# Altium PCB PCB.PcbDoc
Units mm, origin at the board's own origin, x right, y up, seen from the top; angles counter-clockwise.
Board outline 24.4 x 43.9 mm, 2 copper layers (Top Layer, Bottom Layer), stack 1.271 mm thick; 10 components, 28 nets, 78 pads, 96 vias.
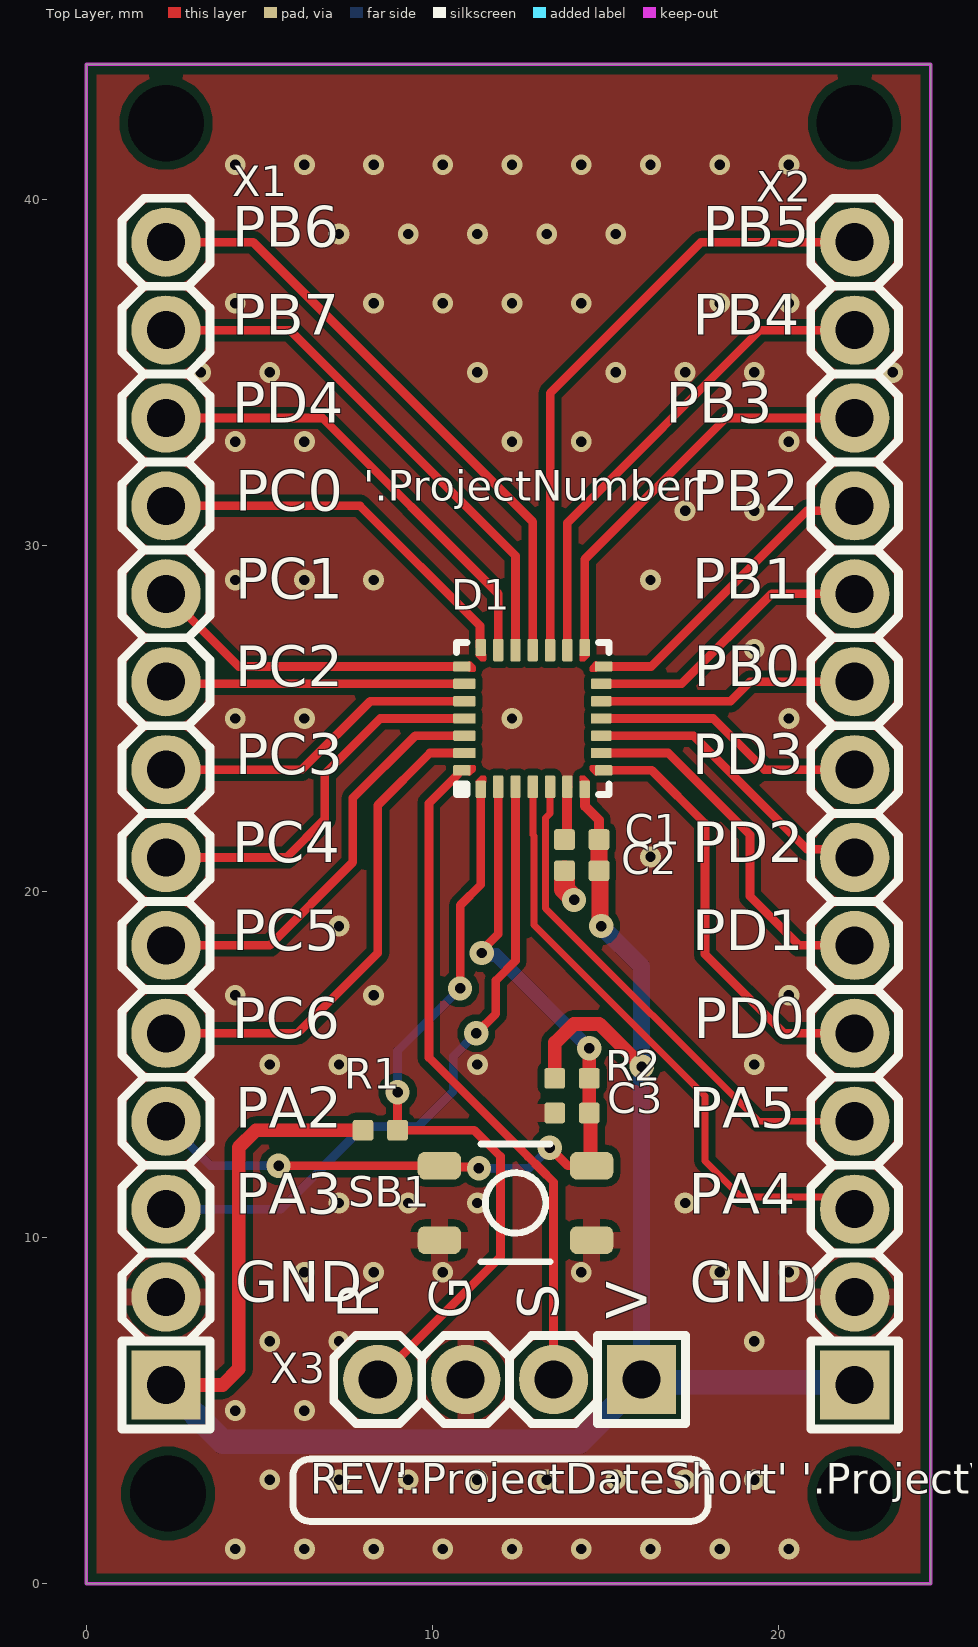
[diagram p0: Top Layer view]
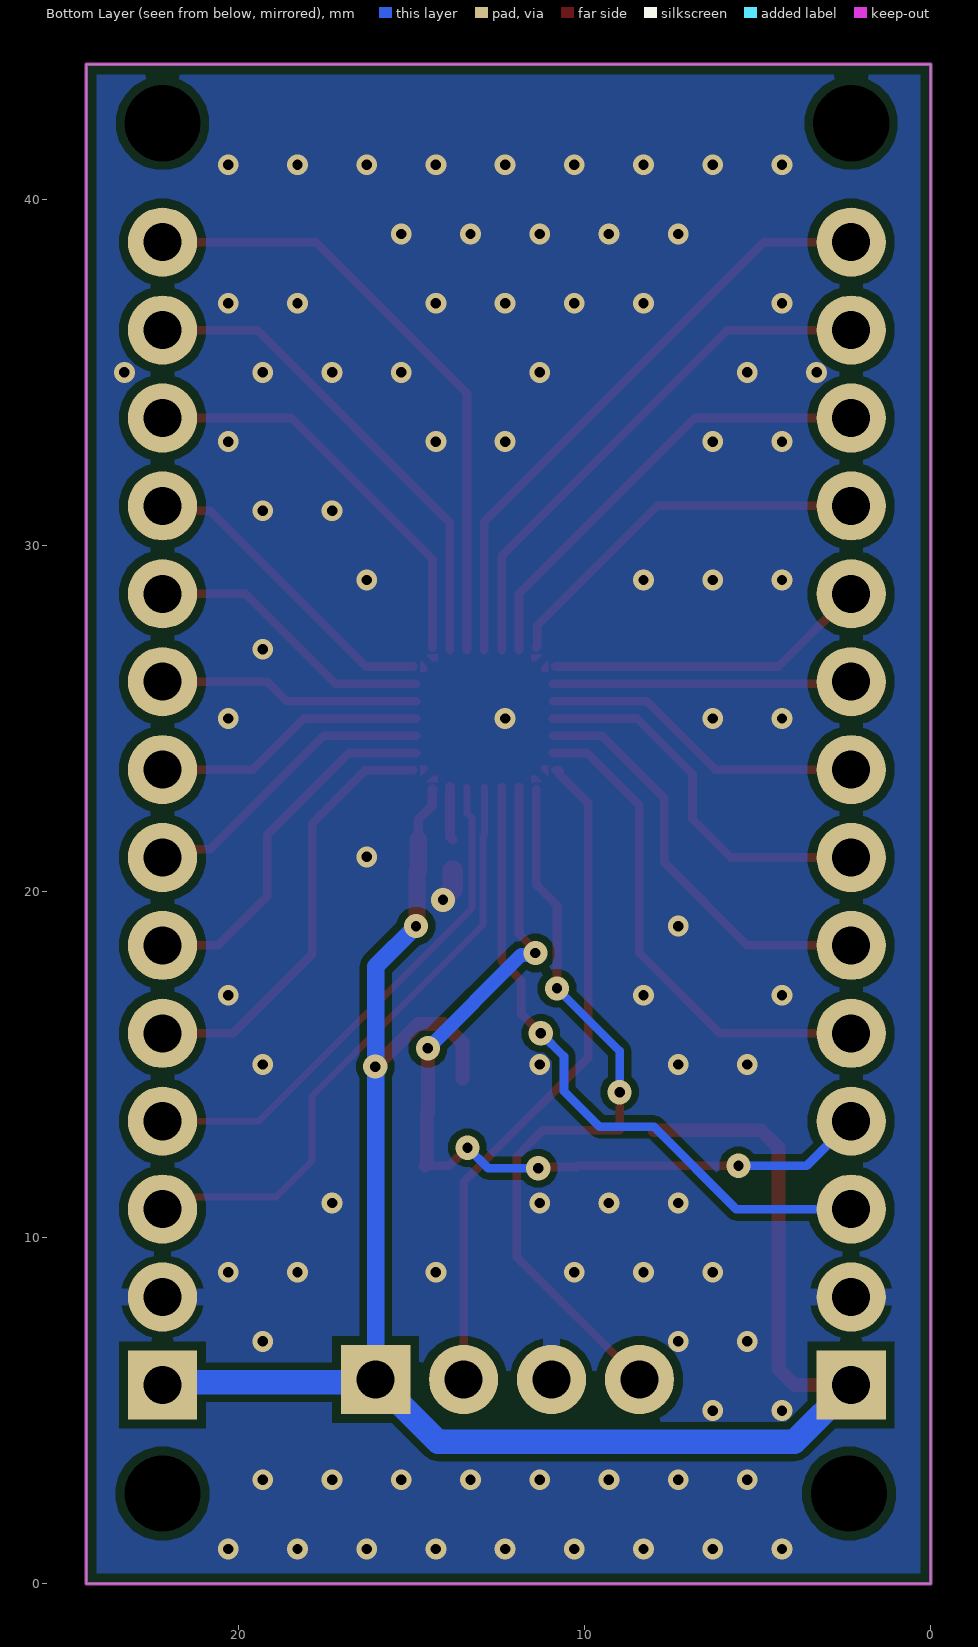
[diagram p1: Bottom Layer view, seen from below]
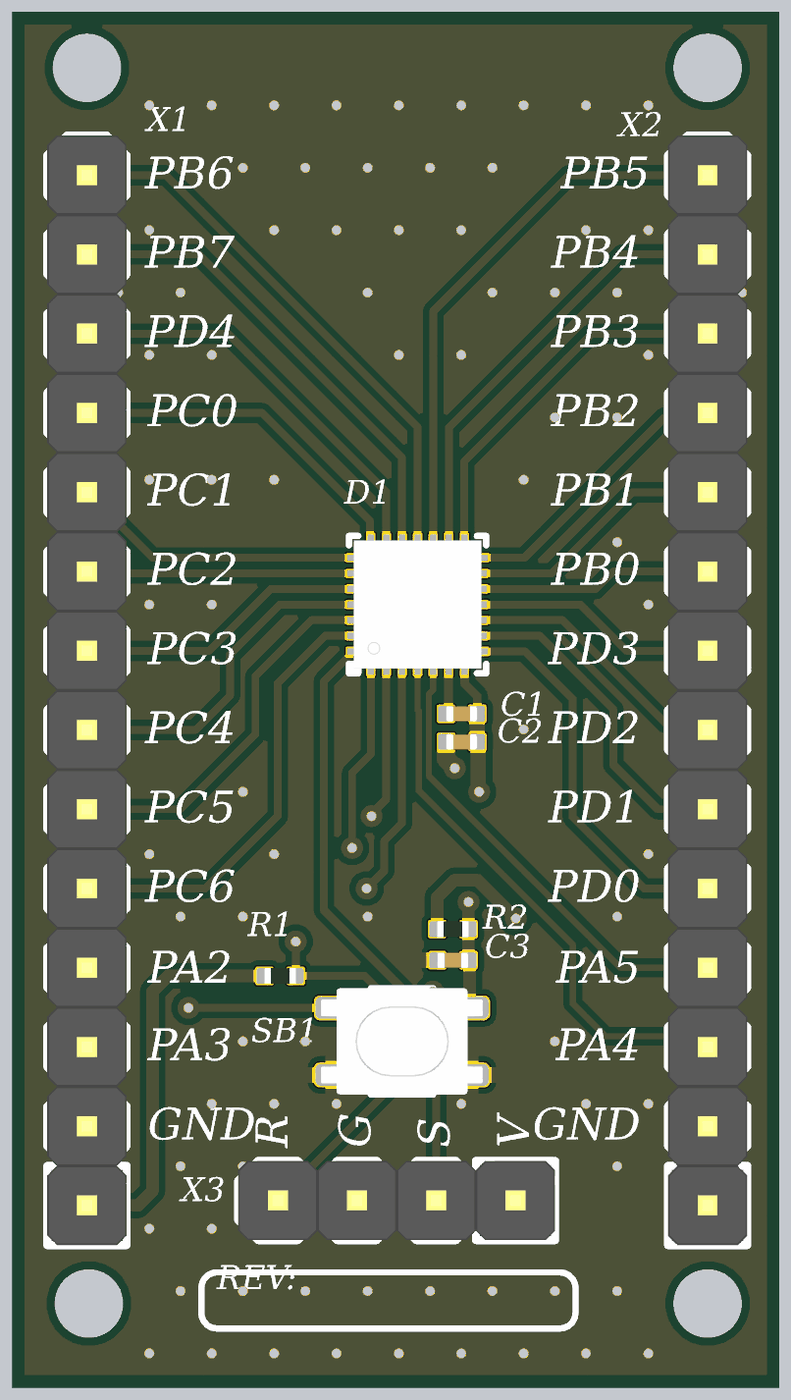
[diagram p2: 3D render of the assembled board from above, using the file's embedded part models]

## Layer stack, top to bottom
Top Solder: solder mask 0.0102, Solder Resist, Dk 3.5
Top Layer: signal copper 0.0356
Dielectric 1: dielectric 1.2, FR-4, Dk 4.8
Bottom Layer: signal copper 0.0356
Bottom Solder: solder mask 0.0102, Solder Resist, Dk 3.5

## Board outline
0,0 0,43.9 24.4,43.9 24.4,0

## Design rules (kind name [scope] priority, off if disabled: settings)
AcuteAngle [All] p1: minimum=4.50000000000000E+0001 checktracksonly=TRUE
BoardOutlineClearance [All] p1: gap=0.3 ignorepadtopadclearanceinfootprint=FALSE
Clearance Clearance_NPTH [All vs InPadClass('NPTH')] p1: gap=0.4 ignorepadtopadclearanceinfootprint=FALSE except(0: Arc-Hole Track-Hole SMDPad-Hole THPad-Hole Via-Hole Fill-Hole Poly-Hole Region-Hole Text-Hole)
Clearance Clearance_MultiLayerPad [OnLayer('Multi-Layer') and IsPad] p2: gap=0.25 ignorepadtopadclearanceinfootprint=FALSE except(0: Arc-Hole Track-Hole SMDPad-Hole THPad-Hole Via-Hole Fill-Hole Poly-Hole Region-Hole Text-Hole)
Clearance Clearance_Polygon [InPolygon] p3: gap=0.2 ignorepadtopadclearanceinfootprint=FALSE except(0: Arc-Hole Track-Hole SMDPad-Hole THPad-Hole Via-Hole Fill-Hole Poly-Hole Region-Hole Text-Hole)
Clearance [All] p4: gap=0.15 ignorepadtopadclearanceinfootprint=FALSE except(0: Arc-Hole Track-Hole SMDPad-Hole THPad-Hole Via-Hole Fill-Hole Poly-Hole Region-Hole Text-Hole; 0.127: Arc-Arc Arc-Track Track-Track)
ComponentClearance [All] p1: gap=0.254 collisioncheckmode=3 verticalgap=0.2 showdistances=FALSE
DiffPairsRouting [All] p1: maxlimit=0.254 minlimit=0.2 mostfreqgap=0.254 toplayer_minwidth=0.2 toplayer_maxwidth=0.5 toplayer_prefwidth=0.3 bottomlayer_minwidth=0.2 bottomlayer_maxwidth=0.5 bottomlayer_prefwidth=0.3 maxuncoupledlength=12.7
Height [All] p1: minheight=0 maxheight=60 prefheight=12.7
HoleSize [All] p1: absolutevalues=TRUE maxlimit=6.3 minlimit=0.3 maxpercent=80.000 minpercent=20.000
HoleToHoleClearance [All] p1: gap=0.5 allowstackedmicrovias=TRUE
MinimumAnnularRing [All] p1: minimumring=0.13
MinimumSolderMaskSliver [All] p1: minsoldermaskwidth=0.05
PasteMaskExpansion [All] p1: expansion=-0.05
PlaneClearance [All] p1: clearance=0.5
PlaneConnect [All] p1: planeconnectstyle=Relief reliefexpansion=0.5 reliefentries=4 reliefconductorwidth=0.3 reliefairgap=0.2
PolygonConnect PolygonConnect_PowerPAD [All vs InPadClass('PowerPAD')] p1: connectstyle=Relief reliefconductorwidth=1 reliefentries=4 polygonreliefangle="90 Angle" airgapwidth=0.3
PolygonConnect PolygonConnect_PadGND [InNet('GND') and IsPad] p2: connectstyle=Relief reliefconductorwidth=0.5 reliefentries=4 polygonreliefangle="90 Angle" airgapwidth=0.2
PolygonConnect PolygonConnect_Via [IsVia] p3: connectstyle=Direct reliefconductorwidth=0.254 reliefentries=4 polygonreliefangle="90 Angle" airgapwidth=0.254
PolygonConnect [All] p4: connectstyle=Relief reliefconductorwidth=0.6 reliefentries=4 polygonreliefangle="90 Angle" airgapwidth=0.3
RoomDefinition MainPage [InComponentClass('MainPage')] p1: confinementstyle=ConfineIn formatcopy=TRUE lockcomponents=FALSE outline 6.769,4.249 6.769,7.551 7.096,7.551 7.096,22.604 10.296,22.604 10.296,27.604 15.504,27.604 15.504,22.204 15.636,22.204 15.636,7.551 17.691,7.551 17.691,4.249
RoomDefinition Connectors [InComponentClass('Connectors')] p2: confinementstyle=ConfineIn formatcopy=TRUE lockcomponents=FALSE outline 0.649,4.09 0.649,40.412 23.851,40.412 23.851,4.09
RoutingVias [All] p1: holewidth=0.3 width=0.7 viastyle="Through Hole" minholewidth=0.3 minwidth=0.6 maxholewidth=0.5 maxwidth=1.2
SilkToSilkClearance [All] p1: silktosilkclearance=0
SilkToSolderMaskClearance [IsPad] p1: minsilkscreentomaskgap=0.15 clearancetoexposedcopper=TRUE
SolderMaskExpansion SolderMaskExpansion_VIa [isVia] p1: expansion=0.102 istentingtop=TRUE
SolderMaskExpansion [All] p2: expansion=0.05 istentingtop=FALSE
UnRoutedNet [All] p1: checkbadconnections=TRUE
Width [All] p1: maxlimit=10 minlimit=0.127 preferedwidth=0.2
18 further rules are at their usual default settings.

## Classes and differential pairs
component class MainPage: C1 C2 D1 R1 X3
component class Connectors: C3 R2 SB1 X1 X2

## Components (designator, comment, footprint, x,y, rotation, side; value= is the part's Value field where it differs from the comment)
C1 "10nF" CH0402C 14.313,21.5 r0 top
C2 "100nF" CH0402C 14.313,20.6 r0 top
C3 "100nF" CH0402C 14.032,13.6 r0 top
D1 "STM8L151GxU6" 28-UFQFPN 12.9,25 r90 top
R1 "100k" CH0402R 8.492,13.1 r180 top
R2 "100k" CH0402R 14.032,14.6 r180 top
SB1 "\"Кнопка\"" "BUT: YTS-A017" 12.4,11 r180 top
X1 "" "CON: PLS-14" 2.3,22.251 r90 top
X2 "" "CON: PLS-14" 22.2,22.251 r90 top
X3 "PLS-4" "CON: PLS-4" 12.23,5.9 r180 top

## Footprints (in the part's own frame and the unit in brackets; to place one, negate y for a bottom-side part, rotate by r counter-clockwise, add the part's x,y. Pads: shape width x height; smd on the part's side, far side on the other; paste and mask are expansions set on the pad)
28-UFQFPN [mm] "28-lead, 4 x 4 mm, 0.5 mm pitch"
  rrect25% 0.5x0.3 smd: 1(-2.05,1.5) 7(-2.05,-1.5) 15(2.05,-1.5) 21(2.05,1.5)
  rrect25% 0.65x0.3 smd: 2(-1.975,1) 3(-1.975,0.5) 4(-1.975,0) 5(-1.975,-0.5) 6(-1.975,-1) 16(1.975,-1) 17(1.975,-0.5) 18(1.975,0) 19(1.975,0.5) 20(1.975,1)
  rrect25% 0.3x0.5 smd: 8(-1.5,-2.05) 14(1.5,-2.05) 22(1.5,2.05) 28(-1.5,2.05)
  rrect25% 0.3x0.6 smd: 9(-1,-1.975) 10(-0.5,-1.975) 11(0,-1.975) 12(0.5,-1.975) 13(1,-1.975)
  rrect25% 0.3x0.65 smd: 23(1,1.975) 24(0.5,1.975) 25(0,1.975) 26(-0.5,1.975) 27(-1,1.975)
  Top Layer region: 1.65,-1.4 1.65,-1.472 1.655,-1.498 1.67,-1.52 1.67,-1.52 1.782,-1.632 1.802,-1.645 1.826,-1.65 1.826,-1.65 1.85,-1.65 1.85,-1.35 1.7,-1.35 1.681,-1.354 1.665,-1.365 1.654,-1.381 1.65,-1.4
  Top Layer region: 1.4,-1.65 1.472,-1.65 1.498,-1.655 1.52,-1.67 1.52,-1.67 1.632,-1.782 1.645,-1.802 1.65,-1.826 1.65,-1.826 1.65,-1.85 1.35,-1.85 1.35,-1.7 1.354,-1.681 1.365,-1.665 1.381,-1.654 1.4,-1.65
  Top Layer region: -1.65,1.4 -1.65,1.472 -1.655,1.498 -1.67,1.52 -1.67,1.52 -1.782,1.632 -1.802,1.645 -1.826,1.65 -1.826,1.65 -1.85,1.65 -1.85,1.35 -1.7,1.35 -1.681,1.354 -1.665,1.365 -1.654,1.381 -1.65,1.4
  Top Layer region: -1.4,1.65 -1.472,1.65 -1.498,1.655 -1.52,1.67 -1.52,1.67 -1.632,1.782 -1.645,1.802 -1.65,1.826 -1.65,1.826 -1.65,1.85 -1.35,1.85 -1.35,1.7 -1.354,1.681 -1.365,1.665 -1.381,1.654 -1.4,1.65
  Top Layer region: 1.4,1.65 1.472,1.65 1.498,1.655 1.52,1.67 1.52,1.67 1.632,1.782 1.645,1.802 1.65,1.826 1.65,1.826 1.65,1.85 1.35,1.85 1.35,1.7 1.354,1.681 1.365,1.665 1.381,1.654 1.4,1.65
  Top Layer region: 1.65,1.4 1.65,1.472 1.655,1.498 1.67,1.52 1.67,1.52 1.782,1.632 1.802,1.645 1.826,1.65 1.826,1.65 1.85,1.65 1.85,1.35 1.7,1.35 1.681,1.354 1.665,1.365 1.654,1.381 1.65,1.4
  Top Layer region: -1.4,-1.65 -1.472,-1.65 -1.498,-1.655 -1.52,-1.67 -1.52,-1.67 -1.632,-1.782 -1.645,-1.802 -1.65,-1.826 -1.65,-1.826 -1.65,-1.85 -1.35,-1.85 -1.35,-1.7 -1.354,-1.681 -1.365,-1.665 -1.381,-1.654 -1.4,-1.65
  Top Layer region: -1.65,-1.4 -1.65,-1.472 -1.655,-1.498 -1.67,-1.52 -1.67,-1.52 -1.782,-1.632 -1.802,-1.645 -1.826,-1.65 -1.826,-1.65 -1.85,-1.65 -1.85,-1.35 -1.7,-1.35 -1.681,-1.354 -1.665,-1.365 -1.654,-1.381 -1.65,-1.4
  silkscreen extent -2.2,-2.2 2.2,2.2, body extent -2.05,-2.05 2.05,2.05, height 0.65
"BUT: YTS-A017" [mm] "Tactile button 5.2x3.4x2.5 SMD"
  rrect50% 1.25x0.8 smd: 1(-2.2,1.075) 1(2.2,1.075) 2(-2.2,-1.075) 2(2.2,-1.075)
  silkscreen extent -1,-1.7 1,1.7, body extent -2.6,-1.7 2.6,1.7, height 2.5
CH0402C [mm]
  rrect25% 0.6x0.6 smd: 1(-0.5,0) 2(0.5,0)
  body extent -0.5,-0.25 0.5,0.25, height 0.5
CH0402R [mm]
  rrect25% 0.6x0.6 smd: 1(-0.5,0) 2(0.5,0)
  body extent -0.5,-0.25 0.5,0.26, height 0.33
"CON: PLS-4" [mm] "PLS-40 4 pin header"
  rect 2x2 hole 1.1: 1(-3.81,0)
  round 2 hole 1.1: 2(-1.27,0) 3(1.27,0) 4(3.81,0)
  silkscreen extent -5.08,-1.27 5.08,1.27, body extent -5.08,-1.27 5.08,1.27, height 8.54
"CON: PLS-14" [mm]
  rect 2x2 hole 1.1: 1(-16.51,0)
  round 2 hole 1.1: 2(-13.97,0) 3(-11.43,0) 4(-8.89,0) 5(-6.35,0) 6(-3.81,0) 7(-1.27,0) 8(1.27,0) 9(3.81,0) 10(6.35,0) 11(8.89,0) 12(11.43,0) 13(13.97,0) 14(16.51,0)
  silkscreen extent -17.78,-1.27 17.78,1.27, body extent -17.78,-1.27 17.78,1.27, height 8.54

## Part data
C1 C2 C3: library part Capacitor
D1: "STM8", Manufacturer="ST Microelectronics", ComponentKind=UFQFPN28, HelpURL=https://ru.mouser.com/datasheet/2/389/stm8l151c4-956418.pdf, Model=STM8L151GxU6
R1 R2: library part Resistor
SB1: library part 1-Button, "Button, no latching"
X1 X2: library part 14-Connector
X3: library part 4-Connector, Model=PLS-4

## Free pads (board coordinates)
  round 0 hole 2.2 unplated paste+0 mask+0.1: 0(2.3,42.2) 0(22.2,2.6) 0(22.2,42.2)
  round 0 hole 2.2 unplated paste+0: 0(2.361,2.6)

## Via types
v1: diameter 0.6, hole 0.3, Top Layer to Bottom Layer, tented both sides, 85 vias
v2: diameter 0.7, hole 0.3, Top Layer to Bottom Layer, tented both sides, 11 vias

## Nets (pads, with @x,y where several pads share a name; then routed paths per layer and width w, separated by ;. In a path a pad name is that pad's centre, name@x,y a point inside that pad or via, vN(x,y) a via of type N, cw(c..) or ccw(c..) an arc to the next point about the centre after c; other vN are vias at no path point)
GND: C1.1 C2.1 C3.1 D1.6 SB1.1 X1.2 X2.2 X3.3 | length 2.5
  Top Layer w0.28: C1.1 13.89,21.577 13.89,23.015 D1.6
  Top Layer w0.6: C2.1 13.813,20.064 14.094,19.783 v2(14.094,19.756)
  other v1: 4.3,1 6.3,1 8.3,1 10.3,1 12.3,1 14.3,1 16.3,1 18.3,1 20.3,1 5.3,3 7.3,3 9.3,3 11.3,3 13.3,3 15.3,3 17.3,3 19.3,3 4.3,5 6.3,5 5.3,7 7.3,7 19.3,7 6.3,9 8.3,9 10.3,9 14.3,9 18.3,9 20.3,9 7.3,11 9.3,11 11.3,11 17.3,11 5.3,15 7.3,15 11.3,15 19.3,15 4.3,17 8.3,17 20.3,17 7.3,19 16.3,21 4.3,25 6.3,25 12.3,25 20.3,25 19.3,27 4.3,29 6.3,29 8.3,29 16.3,29 17.3,31 19.3,31 4.3,33 6.3,33 12.3,33 14.3,33 20.3,33 3.3,35 5.3,35 11.3,35 15.3,35 17.3,35 19.3,35 23.3,35 4.3,37 8.3,37 10.3,37 12.3,37 14.3,37 18.3,37 20.3,37 7.3,39 9.3,39 11.3,39 13.3,39 15.3,39 4.3,41 6.3,41 8.3,41 10.3,41 12.3,41 14.3,41 16.3,41 18.3,41 20.3,41
NetD1_1: D1.1 R1.1 X3.4 | length 22
  Top Layer w0.25: X3.4 11.968,9.448 11.968,12.341 11.209,13.1 R1.1 ; R1.1@8.992,13.192 v2(8.992,14.2) ; v2(10.8,17.2) 10.8,19.6 11.4,20.2 D1.1
  Bottom Layer w0.25: v2(8.992,14.2) 8.992,15.392 v2(10.8,17.2)
NetD1_28: D1.28 X3.2 | length 19.5
  Top Layer w0.25: D1.28 10.75,23.5 10.725,23.475 10.725,23.375 9.9,22.55 9.9,15.202 12.763,12.339 13.129,11.973 13.5,11.602 X3.2
PA2: C3.2 D1.2 R2.1 SB1.2 X1.4 | length 26
  Top Layer w0.25: v2(5.555,12.075) 10.2,12.075 10.238,12.037 11.306,12.037 v2(11.343,12) ; v2(11.425,18.221) 11.425,18.297 11.9,18.772 D1.2 ; v2(13.388,12.598) 13.911,12.075 SB1.2@14.6,12.075
  Top Layer w0.4: v2(14.532,15.468) R2.1 C3.2 14.566,13.566 14.566,12.109 SB1.2@14.6,12.075
  Bottom Layer w0.25: X1.4 3.586,12.075 v2(5.555,12.075) ; v2(11.343,12) 12.79,12 v2(13.388,12.598)
  Bottom Layer w0.4: v2(11.425,18.221) 11.482,18.164 11.836,18.164 v2(14.532,15.468)
PA3: D1.3 X1.3 | length 19.3
  Top Layer w0.25: v2(11.268,15.901) 11.834,16.467 11.834,17.429 12.4,17.995 D1.3
  Bottom Layer w0.25: X1.3 5.621,10.821 8,13.2 9.574,13.2 10.6,14.226 10.6,15.233 v2(11.268,15.901)
PA4: D1.4 X2.3 | length 17.8
  Top Layer w0.2: D1.4 12.9,21.638 12.936,21.603 12.936,19.032 17.875,14.092 17.875,12.208 18.918,11.166 21.856,11.166 X2.3
PA5: D1.5 X2.4 | length 15.1
  Top Layer w0.2: D1.5 13.4,22.257 13.263,22.12 13.263,19.515 19.416,13.361 X2.4
PB0: D1.12 X2.9 | length 7.6
  Top Layer w0.25: D1.12 18.615,25.5 19.177,26.061 X2.9
PB1: D1.13 X2.10 | length 8.4
  Top Layer w0.25: D1.13 17.2,26 19.801,28.601 X2.10
PB2: D1.14 X2.11 | length 9.2
  Top Layer w0.25: D1.14 16.326,26.5 20.825,30.999 22.057,30.999 X2.11
PB3: D1.15 X2.12 | length 12
  Top Layer w0.25: D1.15 14.4,29.6 18.481,33.681 X2.12
PB4: D1.16 X2.13 | length 14.3
  Top Layer w0.25: D1.16 13.9,30.656 19.465,36.221 X2.13
PB5: D1.17 X2.14 | length 18
  Top Layer w0.25: D1.17 13.4,34.4 17.761,38.761 X2.14
PB6: D1.18 X1.14 | length 17.7
  Top Layer w0.25: X1.14 4.825,38.761 12.9,30.687 D1.18
PB7: D1.19 X1.13 | length 15.5
  Top Layer w0.25: X1.13 5.879,36.221 12.4,29.7 D1.19
PC0: D1.21 X1.11 | length 11.1
  Top Layer w0.25: X1.11 7.91,31.141 11.376,27.675 11.376,27.074 D1.21
PC1: D1.22 X1.10 | length 9.4
  Top Layer w0.25: X1.10 4.401,26.5 D1.22
PC2: D1.23 X1.9 | length 8.7
  Top Layer w0.25: X1.9 2.361,26 D1.23
PC3: D1.24 X1.8 | length 9.4
  Top Layer w0.25: X1.8 6.221,23.521 8.2,25.5 D1.24
PC4: D1.25 X1.7 | length 11.1
  Top Layer w0.25: X1.7 5.781,20.981 6.887,22.087 6.887,23.395 8.492,25 D1.25
PC5: D1.26 X1.6 | length 12.2
  Top Layer w0.25: X1.6 5.3,18.441 7.7,20.841 7.7,22.7 9.5,24.5 D1.26
PC6: D1.27 X1.5 | length 14.5
  Top Layer w0.25: X1.5 6.1,15.901 8.42,18.221 8.42,22.491 9.929,24 D1.27
PD0: D1.8 X2.5 | length 12.6
  Top Layer w0.25: D1.8 16.34,23.5 17.875,21.965 17.875,18.186 20.16,15.901 X2.5
PD1: D1.9 X2.6 | length 10.7
  Top Layer w0.25: D1.9 16.815,24 19.177,21.638 19.177,19.865 20.6,18.441 X2.6
PD2: D1.10 X2.7 | length 8.8
  Top Layer w0.25: D1.10 17.546,24.5 20.825,21.221 21.961,21.221 X2.7
PD3: D1.11 X2.8 | length 7.9
  Top Layer w0.25: D1.11 18.115,25 19.594,23.521 X2.8
PD4: D1.20 X1.12 | length 13.3
  Top Layer w0.25: X1.12 6.82,33.681 11.9,28.601 D1.20
VDD: C1.2 C2.2 D1.7 R1.2 R2.2 X1.1 X2.1 X3.1 | length 55.9
  Top Layer w0.28: D1.7 14.41,22.94 14.41,22.466 14.813,22.063 C1.2
  Top Layer w0.4: X1.1 3.941,5.741 4.401,6.201 4.401,12.601 4.9,13.1 R1.2 ; R2.2 13.532,15.632 13.55,15.632 14.086,16.168 14.822,16.168 v2(16.051,14.939)
  Top Layer w0.5: C1.2 C2.2 14.844,20.569 14.844,19.031 v2(14.875,19)
  Bottom Layer w0.4: v2@16.051,14.705 v2(16.051,14.939)
  Bottom Layer w0.5: v2(14.875,19) 16.04,17.835 v2@16.04,14.939 ; X3.1 v2@16.04,14.705
  Bottom Layer w0.7: X1.1 3.941,4.1 14.24,4.1 X3.1 16.119,5.821 22.121,5.821 X2.1

## Polygon pours and split planes (outlines as drawn)
GND on Top Layer "GND_L01_P000" (solid, pour order 0): 0,43.9 0,0 24.4,0 24.4,43.9
GND on Bottom Layer "GND_L02_P001" (solid, pour order 1): 0,0 24.4,0 24.4,43.9 0,43.9

## Keep-outs
Keep-Out Layer:
  the board outline again, w0.1

## Silkscreen, mask and mechanical layers (free items; w line width, h text height)
Top Overlay:
  lines w0.2: 5.965,3.1 cw(c6.465,3.1) 6.465,3.6 17.465,3.6 cw(c17.465,3.1) 17.965,3.1 17.965,2.3 cw(c17.465,2.3) 17.465,1.8 6.465,1.8 cw(c6.465,2.3) 5.965,2.3 5.965,3.1 ; 5.965,3.1 5.965,3.1
  text "PB6" at 4.217,38.236 h2
  text "PB5" at 17.817,38.236 h2
  text "PB7" at 4.217,35.696 h2
  text "PB4" at 17.517,35.696 h2
  text "PD4" at 4.217,33.156 h2
  text "PB3" at 16.745,33.156 h2
  text "'.ProjectNumber'" at 7.997,31 h1.5
  text "PC0" at 4.3,30.616 h2
  text "PB2" at 17.508,30.616 h2
  text "PC1" at 4.3,28.076 h2
  text "PB1" at 17.508,28.076 h2
  text "PC2" at 4.3,25.536 h2
  text "PB0" at 17.545,25.536 h2
  text "PC3" at 4.3,22.996 h2
  text "PD3" at 17.51,22.996 h2
  text "PC4" at 4.217,20.456 h2
  text "PD2" at 17.508,20.456 h2
  text "PC5" at 4.217,17.916 h2
  text "PD1" at 17.508,17.916 h2
  text "PC6" at 4.217,15.376 h2
  text "PD0" at 17.545,15.376 h2
  text "PA2" at 4.3,12.78 h2
  text "PA5" at 17.408,12.78 h2
  text "PA3" at 4.3,10.296 h2
  text "PA4" at 17.408,10.296 h2
  text "GND" at 4.3,7.756 h2
  text "GND" at 17.439,7.756 h2
  text "R" at 8.826,7.646 h2 r90
  text "G" at 11.486,7.646 h2 r90
  text "S" at 14.026,7.646 h2 r90
  text "V" at 16.577,7.646 h2 r90
  text "REV:" at 6.465,2.301 h1.5
  text "'.ProjectDateShort' '.ProjectVersion'" at 8.965,2.312 h1.5
Board Shape:
  the board outline again, w0.2